# EAGLE board Carduino_v20 (EAGLE 9.0.1)
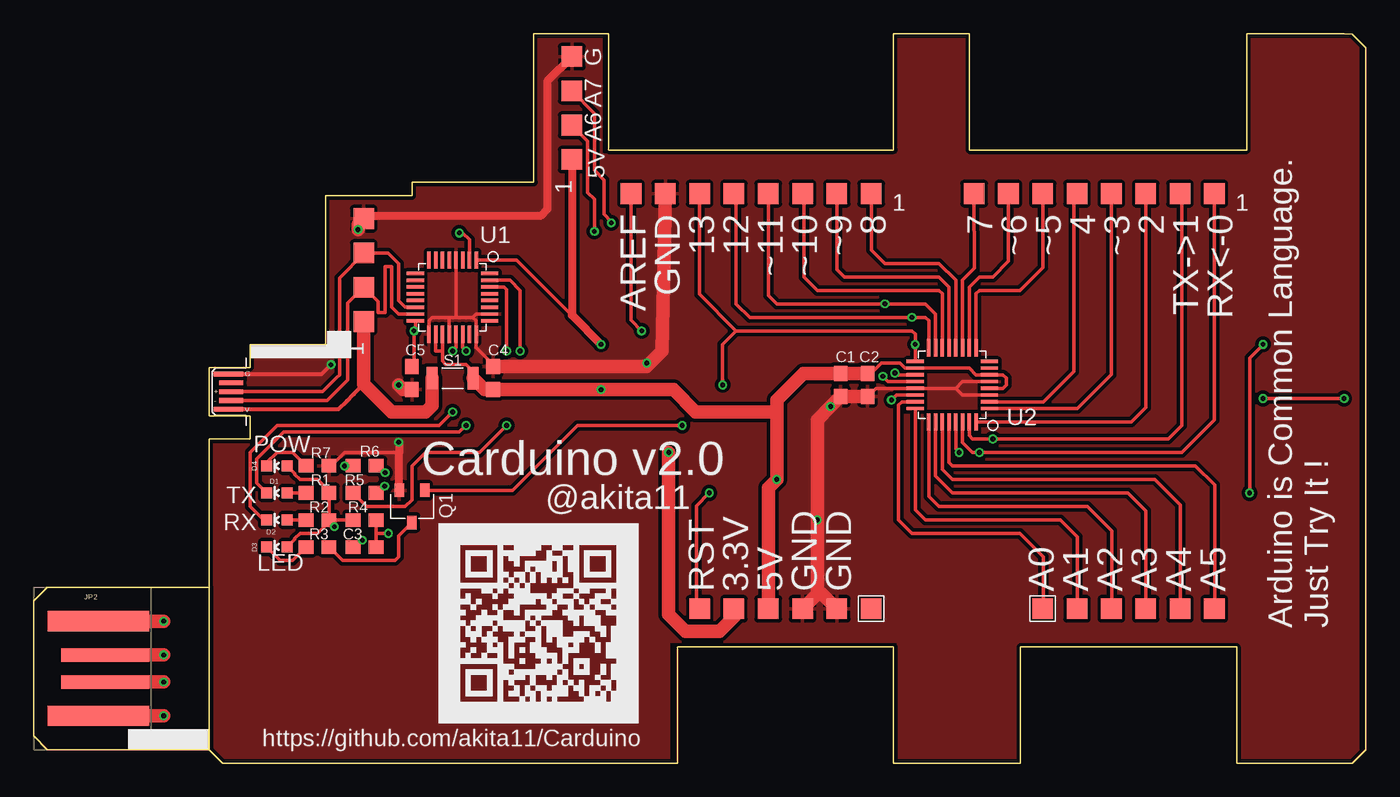
[diagram p0: board, top side]
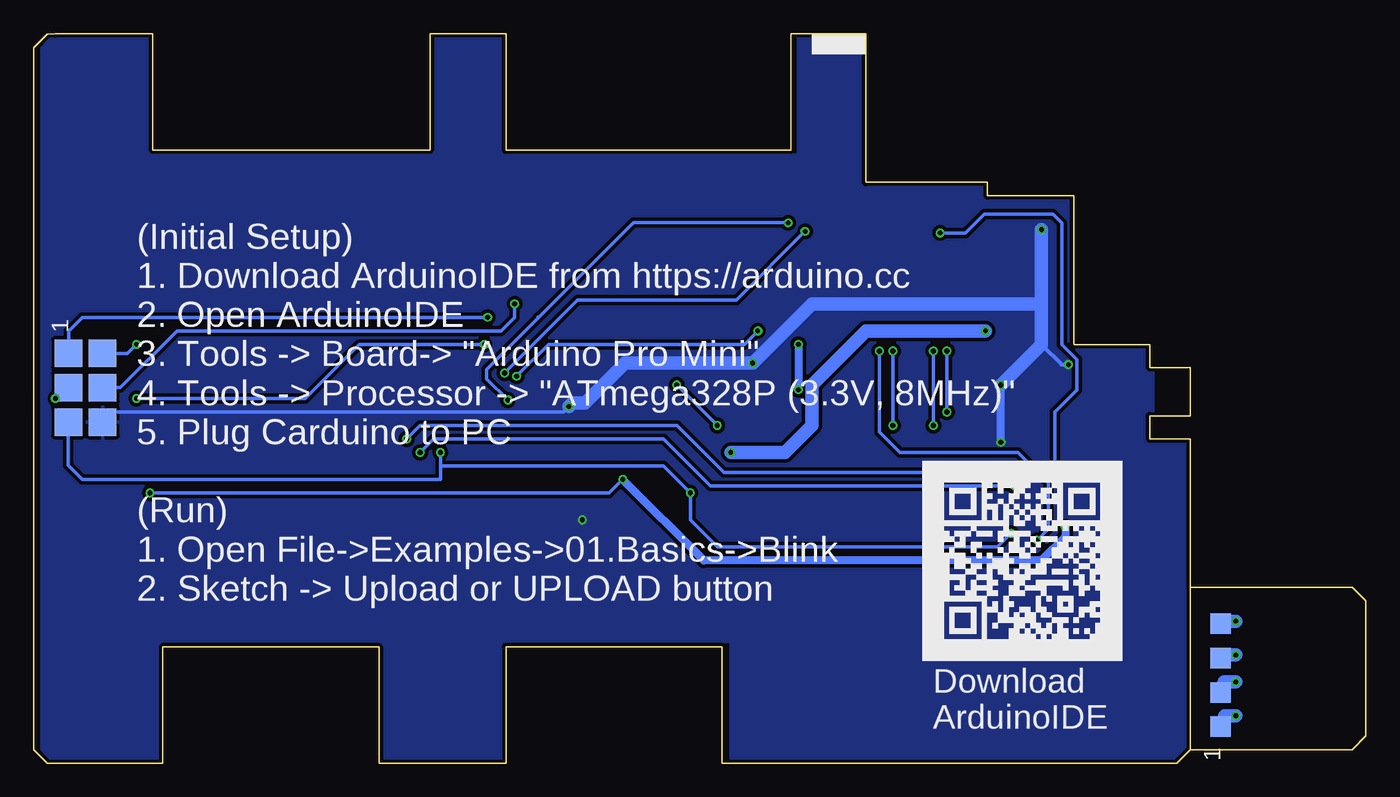
[diagram p1: board, bottom side, seen from below]

Size 98.6 x 54 mm. Coordinates in mm from the lower left corner, seen from the top.
Outline: 13,13 13,24 16,24 16,25.7 13,25.7 13,29.3 16,29.3 16,31 21.6,31 21.6,42 28,42 28,43 37,43 37,54 42.55,54 42.55,45.4 63.65,45.4 63.65,54 69.27,54 69.27,45.4 89.79,45.4 89.79,54 97,54 97.6,53.98 98.6,52.98 98.6,1 97.6,0 89.04,0 89.04,8.6 73.04,8.6 73.04,0 63.65,0 63.65,8.6 47.65,8.6 47.65,0 14,0 13,1
Outline: 13,13 1,13 0,12 0,2 1,1 13,1
Outline: 13,13 13,1
Copper layers (1*16): Top 0.035mm / dielectric 1.5mm / Bottom 0.035mm
Design rules "SeeedStudio_2layer_DRU_no_angle_20140221": minimum track width 6mil, minimum drill 12mil, track to track 6mil, track to pad 6mil, pad to pad 6mil, via to via 6mil, smd to smd 0mil, copper to edge 10mil, drill to drill 10mil, minimum pad ring 10mil, minimum via ring 6mil, stop-mask expansion 2mil, vias tented up to drill 100mil, thermal gap 10mil

## Footprints (pad centres in the part's own frame; a part is rotated, then mirrored left to right if it is on the bottom)
0603 = smd 1.1 x 1: 1 -0.85,0; 2 0.85,0
1X06SMD = smd 1.524 x 1.524: P$1 -6.35,0; P$2 -3.81,0; P$3 -1.27,0; P$4 1.27,0; P$5 3.81,0; P$6 6.35,0
1X08SMD = smd 1.524 x 1.524: P$1 -8.89,0; P$2 -6.35,0; P$3 -3.81,0; P$4 -1.27,0; P$5 1.27,0; P$6 3.81,0; P$7 6.35,0; P$8 8.89,0
2X3SMD = smd 2.032 x 2.032: P$1 -2.54,-1.27; P$2 -2.54,1.27; P$3 0,-1.27; P$4 0,1.27; P$5 2.54,-1.27; P$6 2.54,1.27
1X04SMD = smd 1.524 x 1.524: P$1 -3.81,0; P$2 -1.27,0; P$3 1.27,0; P$4 3.81,0
USB-MICRO-PCB = smd 0.35 x 2.2: 1 1.3,-1.3; 5 -1.3,-1.3 | smd 0.35 x 1.8: 2 0.65,-1.1; 3 0,-1.1; 4 -0.65,-1.1
SPARKFUN_LED-0603 = smd 0.8 x 0.8: A 0,-0.75; C 0,0.75
USB-A-PCB = smd 7.5 x 1.5: 5V -0.2,-3.5; GND -0.2,3.5 | smd 6.5 x 1: USB_M 0.3,-1; USB_P 0.3,1
SOT-23-3-2916 = smd 0.7 x 1: 1 -0.95,-1.2; 2 0.95,-1.2; 3 0,1.2
1206 = smd 0.813 x 1.676: P$1 -1.524,0; P$2 1.524,0
QFN32 = smd 1.27 x 0.25: P$1 -2.75,1.75; P$2 -2.75,1.25; P$3 -2.75,0.75; P$4 -2.75,0.25; P$5 -2.75,-0.25; P$6 -2.75,-0.75; P$7 -2.75,-1.25; P$8 -2.75,-1.75; P$17 2.75,-1.75; P$18 2.75,-1.25; P$19 2.75,-0.75; P$20 2.75,-0.25; P$21 2.75,0.25; P$22 2.75,0.75; P$23 2.75,1.25; P$24 2.75,1.75 | smd 0.25 x 1.27: P$9 -1.75,-2.75; P$10 -1.25,-2.75; P$11 -0.75,-2.75; P$12 -0.25,-2.75; P$13 0.25,-2.75; P$14 0.75,-2.75; P$15 1.25,-2.75; P$16 1.75,-2.75; P$25 1.75,2.75; P$26 1.25,2.75; P$27 0.75,2.75; P$28 0.25,2.75; P$29 -0.25,2.75; P$30 -0.75,2.75; P$31 -1.25,2.75; P$32 -1.75,2.75

## Placement (x,y rotation side)
C1  0.1u  [0603]  59.73,28 270 top
C2  0.1u  [0603]  61.73,28 270 top
C3  0.1u  [0603]  24.5,16 0 top
C4  0.1u  [0603]  34,28.5 90 top
C5  1u  [0603]  28,28.5 270 top
CN1  [1X06SMD]  81.04,11.43 0 top
CN2  [1X06SMD]  55.64,11.43 180 top
CN3  [1X08SMD]  78.5,42.16 180 top
CN4  [1X08SMD]  53.1,42.16 180 top
CN5  CON_AVRISPSMD  [2X3SMD]  94.77,27.79 270 bottom
CN6  [1X04SMD]  24.43,36.5 90 top
CN7  [1X04SMD]  10.75,6.5 90 bottom
CN8  [1X04SMD]  39.83,48.5 90 top
CN9  CON_USB-BMICRO-B_PCB  [USB-MICRO-PCB]  15.71,27.5 270 top
D1  [SPARKFUN_LED-0603]  18,20 90 top
D2  [SPARKFUN_LED-0603]  18,18 90 top
D3  [SPARKFUN_LED-0603]  18,16 90 top
D4  [SPARKFUN_LED-0603]  18,22 90 top
JP2  CON_USBPCB  [USB-A-PCB]  5,7 0 top
Q1  TR_NMOS_IRLML6344  [SOT-23-3-2916]  28,19 180 top
R1  1k  [0603]  21,20 0 top
R2  1k  [0603]  21,18 0 top
R3  1k  [0603]  21,16 0 top
R4  10k  [0603]  24.5,18 180 top
R5  1k  [0603]  24.5,20 0 top
R6  1k  [0603]  24.5,22 0 top
R7  1k  [0603]  21,22 0 top
S1  POLYSW_1206  [1206]  31,28.5 0 top
U1  IC_FT232RQ  [QFN32]  31,34.5 270 top
U2  MCU_ATMEGA328P_ARDUINO32M  [QFN32]  68,28 180 top

## Library data of the parts
C1-C5 CN1-CN9 D1-D4 JP2 Q1 R1-R7 S1 U1 U2 = akita

## Nets
+3V3: C5.1 CN2.P$5 U1.P$16
+5V: C1.1 C2.1 C4.1 CN2.P$4 CN5.P$2 CN8.P$1 D3.A D4.A R1.2 R2.2 R4.2 S1.P$2 U1.P$1 U1.P$18 U1.P$19 U2.P$4 U2.P$6 U2.P$18
A0: CN1.P$1 U2.P$23
A1: CN1.P$2 U2.P$24
A2: CN1.P$3 U2.P$25
A3: CN1.P$4 U2.P$26
A4: CN1.P$5 U2.P$27
A5: CN1.P$6 U2.P$28
A6: CN8.P$2 U2.P$19
A7: CN8.P$3 U2.P$22
D0: CN3.P$1 R5.2 U2.P$30
D1: CN3.P$2 R6.2 U2.P$31
D2: CN3.P$3 U2.P$32
D3: CN3.P$4 U2.P$1
D4: CN3.P$5 U2.P$2
D5: CN3.P$6 U2.P$9
D6: CN3.P$7 U2.P$10
D7: CN3.P$8 U2.P$11
D8: CN4.P$1 U2.P$12
D9: CN4.P$2 U2.P$13
D10: CN4.P$3 U2.P$14
D11: CN4.P$4 CN5.P$4 U2.P$15
D12: CN4.P$5 CN5.P$1 U2.P$16
D13: CN4.P$6 CN5.P$3 Q1.1 U2.P$17
DTR: C3.1 U1.P$31
GND: C1.2 C2.2 C4.2 C5.2 CN2.P$2 CN2.P$3 CN4.P$7 CN5.P$6 CN6.P$4 CN8.P$4 CN9.5 Q1.2 R7.2 U1.P$4 U1.P$17 U1.P$20 U1.P$24 U1.P$26 U2.P$3 U2.P$5 U2.P$21
N$1: D1.A R1.1
N$2: D2.A R2.1
N$3: R5.1 U1.P$30
N$4: R6.1 U1.P$2
N$5: D1.C U1.P$22
N$6: D2.C U1.P$21
N$7: D3.C R3.1
N$8: CN6.P$2 CN9.2 U1.P$15
N$9: CN7.P$4 JP2.GND
N$10: Q1.3 R3.2
N$11: CN7.P$1 JP2.5V
N$12: CN7.P$2 JP2.USB_M
N$13: CN7.P$3 JP2.USB_P
N$14: D4.C R7.1
N$17: CN6.P$3 CN9.3 U1.P$14
N$18: CN6.P$1 CN9.1 S1.P$1
RSTN: C3.2 CN2.P$6 CN5.P$5 R4.1 U2.P$29
VREF: CN4.P$8 U2.P$20

## Tracks (layer width: path | path; a pad name or v marks a point on that pad's centre or on a via)
+3V3  (via drill 0.35)
  Top 0.254: U1.P$16 28.25,32.1 v28.14,32 28.14,29.5 C5.1
  Top 1.016: v47,23 47,11 48.25,9.75 50.75,9.75 51.83,10.83 CN2.P$5
  Bottom 1.016: v28.14,32 37,32 41,28 41,25 43,23 v47,23
+5V  (via drill 0.35)
  Top 0.254: U1.P$19 30.25,30.5 | 30.25,30.5 30.25,29.75 30.5,29.5 32,29.5 32.52,28.98 S1.P$2 | 19,21.75 D4.A 19.32,21.43 19.32,21.38 19.7,21 21,21 21.85,20.15 R1.2 R2.2 | 19,16.25 D3.A 19.32,16.57 19.32,16.62 19.7,17 21,17 21.85,17.85 R2.2 | R4.2 R2.2 | U2.P$4 71.75,27.75 72,28 72,28.5 71.75,28.75 U2.P$6 69.75,28.75 69.25,29.25 U2.P$18 64.5,29.25 64.12,29.62 62.75,29.62 61.98,28.85 C2.1 | v91,31 90,30 v90,20 | U1.P$1 35.75,37.25 v42,31 | U1.P$18 29.75,30.5 30.25,30.5
  Top 0.61: R2.2 21.85,17.9 v22.25,17.5 | CN8.P$1 39.83,33.17 v42,31
  Top 1.016: S1.P$2 33.37,27.65 C4.1 v42,27.65 47.35,27.65 49,26 55,26 | C2.1 C1.1 56.98,28.85 55,26.88 55,26 | 55,26 v55,21 54.37,20.37 CN2.P$4
  Bottom 0.254: 93.17,30 CN5.P$2 91.67,30.33 v91,31 | v90,20 56,20 v55,21 | 42,27.94 v42,27.65
  Bottom 0.61: v22.25,17.5 22.25,16.75 24,15 49,15 v55,21 | v42,31 42,27.94
A0
  Top 0.254: U2.P$23 64.25,26.75 64,26.5 64,18 65,17 73,17 74.72,15.28 74.72,11.46 CN1.P$1
A1
  Top 0.254: U2.P$24 65.25,18.75 66,18 76,18 77.26,16.74 77.26,11.46 CN1.P$2
A2
  Top 0.254: U2.P$25 66.25,19.75 67,19 78,19 79.8,17.2 79.8,11.46 CN1.P$3
A3
  Top 0.254: U2.P$26 66.75,21.25 68,20 81,20 82.34,18.66 82.34,11.46 CN1.P$4
A4
  Top 0.254: U2.P$27 67.25,21.75 68,21 83,21 84.88,19.12 84.88,11.46 CN1.P$5
A5
  Top 0.254: U2.P$28 67.75,22.25 68,22 86,22 87.42,20.58 87.42,11.46 CN1.P$6
A6  (via drill 0.35)
  Top 0.254: U2.P$19 63.88,28.75 v63.75,28.88 | v41.5,39.37 41.5,41.75 41,42.25 41,46.06 CN8.P$2
  Bottom 0.254: v63.75,28.88 58.34,34.29 46.58,34.29 v41.5,39.37
A7  (via drill 0.35)
  Top 0.254: U2.P$22 63.88,27.25 v63.5,26.88 | v42.75,40 42.75,40.1 42.21,40.64 42.21,43.18 41.5,43.89 41.5,47 41.5,47.6 41.5,48.1 CN8.P$3
  Bottom 0.254: v63.5,26.88 65.07,28.45 65.07,29.12 61.26,32.93 | 61.26,32.93 61.26,33.02 | v42.75,40 54.19,40 61.26,32.93
D0  (via drill 0.35)
  Top 0.254: R5.2 v25.97,20.5 | U2.P$30 68.75,23.75 69.5,23 v70,23 85,23 87.39,25.39 CN3.P$1
  Bottom 0.254: v70,23 69,24 52,24 48.5,20.5 v25.97,20.5
D1  (via drill 0.35)
  Top 0.254: R6.2 v26,21.5 | U2.P$31 69.25,24.25 69.5,24 v71,24 84,24 85,25 85,42.01 CN3.P$2
  Bottom 0.254: v71,24 70,25 51,25 47.5,21.5 v26,21.5
D2
  Top 0.254: U2.P$32 81.25,25.25 82.34,26.34 82.31,26.37 CN3.P$3
D3
  Top 0.254: CN3.P$4 79.77,28.77 77.25,26.25 U2.P$1
D4
  Top 0.254: U2.P$2 74.75,26.75 77,29 77,41.93 CN3.P$5
D5
  Top 0.254: U2.P$9 69.75,34.75 70,35 73,35 74.69,36.69 CN3.P$6
D6
  Top 0.254: U2.P$10 69.25,35.25 70,36 71,36 72.15,37.15 CN3.P$7
D7
  Top 0.254: U2.P$11 68.75,35.75 69.64,36.64 CN3.P$8
D8
  Top 0.254: U2.P$12 68.25,35.75 67,37 63,37 62,38 62,41.91 CN4.P$1
D9
  Top 0.254: U2.P$13 67.75,35.25 67,36 60,36 59.45,36.55 CN4.P$2
D10
  Top 0.254: U2.P$14 67.25,34.75 67,35 58,35 57,36 57,42.07 CN4.P$3
D11  (via drill 0.35)
  Top 0.254: U2.P$15 66.75,33.25 66,34 v63,34 55,34 54.37,34.63 CN4.P$4
  Bottom 0.254: CN5.P$4 92.21,27.79 88,32 64,32 63,33 v63,34
D12  (via drill 0.35)
  Top 0.254: U2.P$16 66.25,32.75 66,33 v65,33 53,33 52,34 52,41.99 CN4.P$5
  Bottom 0.254: CN5.P$1 96,30.37 96,32 95,33 v65,33
D13  (via drill 0.35)
  Top 0.254: U2.P$17 v65.25,31 65.25,31.75 65,32 52,32 | v91,27 v97,27 | v51,28 51,31 52,32 | v48,25 40.25,25 35.45,20.2 Q1.1 | CN4.P$6 49.29,34.71 52,32
  Bottom 0.254: v65.25,31 74.5,31 78.5,27 v91,27 | v97,27 96.25,28 CN5.P$3 | v48,25 v51,28
DTR  (via drill 0.35)
  Top 0.254: C3.1 24.15,16.5 v24.32,16.5 | v36,30.5 36,35 35.25,35.75 U1.P$31
  Bottom 0.254: v36,30.5 36,24.5 34.5,23 25.75,23 23.5,20.75 23.5,17.32 v24.32,16.5
GND  (via drill 0.35)
  Top 0.254: C4.2 34,29.5 32.75,30.75 U1.P$24 32.75,32.75 32.5,33 | U1.P$17 29.25,32.75 29.5,33 30.75,33 | 32.5,33 31.25,33 | 31.25,33 30.75,33 | U1.P$26 32.75,33.25 32.5,33 | U1.P$20 30.75,33 | U1.P$4 31.25,33 | 68.25,27.75 U2.P$21 62.33,27.75 C2.2 | 68.25,27.75 68.75,27.25 U2.P$3 | U2.P$5 68.75,28.25 68.25,27.75 | R7.2 22,22 23,23 27.05,23 | v45.38,29.62 45.38,29.38 45.35,29.35
  Top 0.305: CN9.5 21.3,28.8 v22,29.5
  Top 0.61: Q1.2 27.05,23 27.05,23.7 v27,23.75 | CN8.P$4 38,50.48 38,41 37.5,40.5 24.62,40.5 24,39.88
  Top 1.016: C5.2 27.35,27.65 v27,28 | v24,39.5 24,39.88 CN6.P$4 | CN4.P$7 46.51,30.51 45.35,29.35 C4.2 | C2.2 C1.2 v58.98,26.41 58,25.42 v58,18 58,12.52 | 58,12.52 CN2.P$3 | 58,12.52 58.36,12.52 CN2.P$2
  Bottom 0.254: CN5.P$6 93.5,25.5 93,26 59.39,26 58.72,26.67
  Bottom 0.305: v22,29.5 22.5,29.5 24,31
  Bottom 0.61: v27,23.75 v27,28
  Bottom 1.016: v27,28 24,31 24,34 | 24,34 v24,39.5 | 24,34 41,34 v45.38,29.62 54.84,29.62 57.79,26.67 58.72,26.67 v58.98,26.41
  pour Bottom (isolate 0.254): 13,54 42,54 42,45 64,45 64,54 69,54 69,45 90,45 90,54 98,54 98,0 89,0 89,9 73,9 73,0 64,0 64,9 47,9 47,0 13,0
  pour Top (isolate 0.254): 13,54 42,54 42,45 64,45 64,54 69,54 69,45 90,45 90,54 98,54 98,0 89,0 89,9 73,9 73,0 64,0 64,9 47,9 47,0 13,0
N$1
  Top 0.254: D1.A R1.1
N$2
  Top 0.254: D2.A R2.1
N$3  (via drill 0.35)
  Top 0.254: U1.P$30 34.83,35.25 35,35.08 v35,30.5 | R5.1 24.65,19 27.5,19 28,19.5 28,22 29,23 33,23 v35,25
  Bottom 0.254: v35,25 v35,30.5
N$4  (via drill 0.35)
  Top 0.254: R6.1 v23,22 | U1.P$2 32.25,38.75 31.75,39.25 v31.5,39.25
  Bottom 0.254: v23,22 23,26 21.39,27.61 21.39,29.89 22.5,31 22.5,39.98 23.16,40.64 28.24,40.64 29.63,39.25 v31.5,39.25
N$5  (via drill 0.35)
  Top 0.254: U1.P$22 31.75,30.75 v32,30.5 | D1.C 16.5,20.75 16.5,22.5 18.5,24.5 31.5,24.5 v32,25
  Bottom 0.254: v32,25 v32,30.5
N$6  (via drill 0.35)
  Top 0.254: U1.P$21 31.25,30.75 v31,30.5 | D2.C 17,18 16,19 16,23 18,25 30,25 v31,26
  Bottom 0.254: v31,30.5 v31,26
N$7
  Top 0.254: D3.C 18.25,15 19.15,15 R3.1
N$8
  Top 0.254: U1.P$15 27,33.25 26.5,33.75 26.5,36.75 26,36.75 26,33.38 25.5,33.38 25.5,34.16 CN6.P$2 23.25,34.05 23.25,28.38 22.44,27.56 22.35,27.48 21.73,26.85 CN9.2
N$9  (via drill 0.35)
  Top 1.016: 4.99,10.31 JP2.GND v9.62,10.5
  Bottom 1.016: CN7.P$4 10.44,10.5 v9.62,10.5
N$10
  Top 0.254: Q1.3 27,16.8 27,15.25 26.75,15 22.85,15 R3.2
N$11  (via drill 0.35)
  Top 1.016: v9.62,3.5 JP2.5V
  Bottom 1.016: CN7.P$1 10.44,3.5 v9.62,3.5
N$12  (via drill 0.35)
  Top 1.016: v9.62,6 JP2.USB_M
  Bottom 1.016: CN7.P$2 10.48,6 v9.62,6
N$13  (via drill 0.35)
  Top 1.016: v9.62,8 JP2.USB_P
  Bottom 1.016: CN7.P$3 10.48,8 v9.62,8
N$14
  Top 0.254: D4.C 17.25,22.25 18,23 19.15,23 R7.1
N$17
  Top 0.254: U1.P$14 27.5,33.75 27,34.25 27,37 26.23,37.77 CN6.P$3 24.45,37.75 22.62,35.92 22.62,28.75 22.44,28.56 22,28.12 21.38,27.5 CN9.3
N$18
  Top 0.305: 24.43,28.07 23.68,27.32 23.19,26.82 22.56,26.2 CN9.1
  Top 1.016: 29.48,26.48 29.5,26.5 | S1.P$1 29.48,26.48 | 29.48,26.48 29,26 26.5,26 24.43,28.07 CN6.P$1
RSTN  (via drill 0.35)
  Top 0.254: R4.1 25.35,17 | 25.35,17 C3.2 | 25.35,17 v26.25,17 | v50,20 49.05,19.05 49.05,11.67 CN2.P$6 | U2.P$29 68.25,23.25 v68.5,23
  Bottom 0.254: v68.5,23 68.5,22 | 68.5,22 68.5,21 95,21 96.04,22.04 CN5.P$5 | v26.25,17 27.25,16 48,16 50,18 v50,20 52,22 68.5,22
VREF  (via drill 0.35)
  Top 0.254: U2.P$20 63.25,28.25 v62.85,28.64 | CN4.P$8 44.21,32.79 v45,32
  Bottom 0.254: v45,32 46,31 60.5,31 v62.85,28.64

## Text on the board
tPlace: G | A7 | A6 | 5V | AREF | GND | 13 | 12 | ~11 | ~10 | ~9 | 8 | 7 | ~6 | ~5 | 4 | ~3 | 2 | TX->1 | RX<-0 | U1 | U2 | POW | Carduino v2.0 | TX | @akita11 | RX | LED | RST | 3.3V | 5V | GND | GND | A0 | A1 | A2 | A3 | A4 | A5 | Arduino is Common Language. / Just Try It ! | https://github.com/akita11/Carduino
bPlace: (Initial Setup) / 1. Download ArduinoIDE from https://arduino.cc / 2. Open ArduinoIDE / 3. Tools -> Board-> "Arduino Pro Mini" / 4. Tools -> Processor -> "ATmega328P (3.3V, 8MHz)" / 5. Plug Carduino to PC / / (Run) / 1. Open File->Examples->01.Basics->Blink / 2. Sketch -> Upload or UPLOAD button | Download / ArduinoIDE
Document: t=0.6mm